# EAGLE board micBOB_v0 (EAGLE 9.5.2)
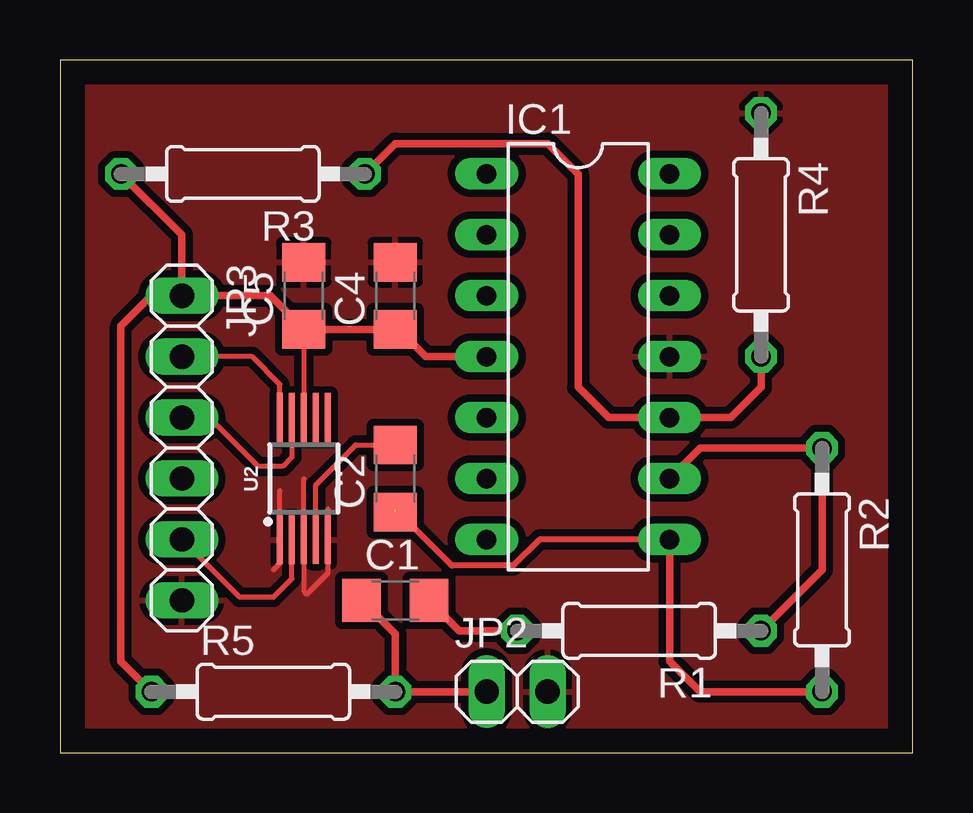
[diagram p0: board, top side]

Size 35.54 x 28.88 mm. Coordinates in mm from the lower left corner, seen from the top.
Outline: 0,0 35.54,0 35.54,28.88 0,28.88 0,0
Copper layers (1*16): Top 0.035mm / dielectric 1.5mm / Bottom 0.035mm
Design rules "default *": minimum track width 6mil, minimum drill 0.35mm, track to track 12mil, track to pad 12mil, pad to pad 12mil, via to via 6mil, smd to smd 6mil, copper to edge 40mil, drill to drill 6mil, minimum pad ring 10mil, minimum via ring 8mil, stop-mask expansion 4mil, vias tented up to drill 0mil, thermal gap 10mil

## Footprints (pad centres in the part's own frame; a part is rotated, then mirrored left to right if it is on the bottom)
C1206 = smd 1.6 x 1.8: 1 -1.4,0; 2 1.4,0
DIL14 = drill 0.813 long: 1 -7.62,-3.81; 2 -5.08,-3.81; 3 -2.54,-3.81; 4 0,-3.81; 5 2.54,-3.81; 6 5.08,-3.81; 7 7.62,-3.81; 8 7.62,3.81; 9 5.08,3.81; 10 2.54,3.81; 11 0,3.81; 12 -2.54,3.81; 13 -5.08,3.81; 14 -7.62,3.81
1X02 = drill 1.016 long: 1 -1.27,0; 2 1.27,0
1X06 = drill 1.016 long: 1 -6.35,0; 2 -3.81,0; 3 -1.27,0; 4 1.27,0; 5 3.81,0; 6 6.35,0
0207/10 = drill 0.813 octagon: 1 -5.08,0; 2 5.08,0
MSOP10 = smd 0.25 x 2: 1 -1,-2.55; 2 -0.5,-2.55; 3 0,-2.55; 4 0.5,-2.55; 5 1,-2.55; 6 1,2.55; 7 0.5,2.55; 8 0,2.55; 9 -0.5,2.55; 10 -1,2.55

## Placement (x,y rotation side)
C1  0.1uF  [C1206]  13.97,6.35 0 top
C2  0.1uF  [C1206]  13.97,11.43 90 top
C4  0.1uF  [C1206]  13.97,19.05 90 top
C5  0.1uF  [C1206]  10.16,19.05 90 top
IC1  LM324N  [DIL14]  21.59,16.51 270 top
JP2  [1X02]  19.05,2.54 0 top
JP3  [1X06]  5.08,12.7 270 top
R1  45k  [0207/10]  24.13,5.08 180 top
R2  100k  [0207/10]  31.75,7.62 270 top
R3  10k  [0207/10]  7.62,24.13 180 top
R4  10k  [0207/10]  29.21,21.59 270 top
R5  5k  [0207/10]  8.89,2.54 0 top
U2  ADS1015  [MSOP10]  10.16,11.43 0 top

## Library data of the parts
C1 C2 C4 C5 = rcl; SPICEPREFIX: C
IC1 = linear
JP2 JP3 = pinhead
R1-R5 = rcl; SPICEPREFIX: R
U2 = SparkFun-IC-Conversion; PROD_ID: IC-12270

## Nets
+3V3: C4.1 C5.1 IC1.4 JP3.1 R3.2 R5.1 U2.8
GND: C4.2 C5.2 IC1.11 JP2.2 JP3.6 R4.1 U2.1 U2.3 U2.5
N$1: IC1.9 R1.1 R2.1
N$2: C2.1 IC1.8 R2.2
N$3: IC1.10 R3.1 R4.2
N$4: C1.1 JP2.1 R5.2
N$5: C2.2 U2.4
N$8: JP3.5 U2.2
N$9: JP3.2 U2.10
N$11: JP3.3 U2.9
S_IN: C1.2 R1.2

## Tracks (layer width: path | path; a pad name or v marks a point on that pad's centre or on a via)
+3V3
  Top 0.203: C5.1 U2.8
  Top 0.305: R5.1 2.54,3.81 2.54,17.78 3.81,19.05 JP3.1 | JP3.1 8.76,19.05 C5.1 C4.1 14.1,17.65 15.24,16.51 IC1.4 | R3.2 5.08,21.59 JP3.1
GND
  Top 0.203: 9.14,10.92 9.16,10.91 U2.1 9.16,7.89 8.89,7.62 | 10.16,11.43 U2.3 10.16,6.73 10.29,6.6 11.16,7.48 U2.5 11.16,10.14 11.18,10.16
  pour Top: -1.27,44.45 40.64,44.45 41.91,43.18 41.91,-3.81 -2.54,-3.81 -2.54,43.18
N$1
  Top 0.305: R1.1 31.75,7.62 R2.1 26.67,12.7 IC1.9
N$2  (1 unrouted)
  Top 0.254: IC1.8 19.98,8.89 18.89,7.8 16.33,7.8 13.97,10.16
  Top 0.305: R2.2 26.67,2.54 25.4,3.81 IC1.8
N$3
  Top 0.305: R4.2 29.21,15.24 27.94,13.97 IC1.10 22.86,13.97 21.59,15.24 21.59,24.13 20.32,25.4 13.97,25.4 R3.1
N$4
  Top 0.305: C1.1 13.97,4.95 R5.2 JP2.1
N$5
  Top 0.203: U2.4 10.66,11.17 12.32,12.83 C2.2
N$8
  Top 0.203: JP3.5 7.49,6.48 8.89,6.48 9.66,7.25 U2.2
N$9
  Top 0.203: U2.10 9.16,15.35 8,16.51 JP3.2
N$11
  Top 0.203: JP3.3 6.22,13.97 8.26,11.94 9.27,11.94 9.66,12.33 U2.9
S_IN
  Top 0.305: C1.2 16.64,5.08 R1.2